# EAGLE board Grand_Wluff-Migelo (EAGLE 9.7.0)

Size 82.4 x 126.41 mm. Coordinates in mm from the lower left corner, seen from the top.
Outline: 0,0 82.4,0 82.4,126.41 0,126.41 0,0
Copper layers (1*16): Top 0.035mm / dielectric 1.5mm / Bottom 0.035mm
Design rules "default": minimum track width 6mil, minimum drill 0.35mm, track to track 6mil, track to pad 6mil, pad to pad 6mil, via to via 6mil, smd to smd 6mil, copper to edge 40mil, drill to drill 6mil, minimum pad ring 10mil, minimum via ring 8mil, stop-mask expansion 4mil, vias tented up to drill 0mil, thermal gap 10mil

## Footprints (pad centres in the part's own frame; a part is rotated, then mirrored left to right if it is on the bottom)
LEDRD254W60D565H860B = drill 0.981 pad 1.581: 1 -1.27,0; 2 1.27,0
RESAD1016W63L850D250B = drill 0.83 pad 1.43: 1 -5.08,0; 2 5.08,0
SWITCH-SPDT-PTH-8.5X3.7MM = drill 1.016 pad 1.88: 1 -2.54,0; 2 0,0; 3 2.54,0
SWITCH-MOMENTARY-PTH-6.5MM = drill 1.016 pad 1.88: 1 -3.251,2.261; 2 3.251,2.261; 3 -3.251,-2.261; 4 3.251,-2.261
ARDUINO-UNO-R3-SHIELD = drill 1.016 pad 1.88: 3.3V 24.13,-2.54; 5V 24.13,0; A0 24.13,12.7; A1 24.13,15.24; A2 24.13,17.78; A3 24.13,20.32; A4 24.13,22.86; A5 24.13,25.4; AREF -24.13,-13.97; D2 -24.13,20.32; D3 -24.13,17.78; D4 -24.13,15.24; D5 -24.13,12.7; D6 -24.13,10.16; D7 -24.13,7.62; D8 -24.13,3.81; D9 -24.13,1.27; D10 -24.13,-1.27; D11 -24.13,-3.81; D12 -24.13,-6.35; D13 -24.13,-8.89; GND@0 24.13,2.54; GND@1 24.13,5.08; GND@2 -24.13,-11.43; IOREF 24.13,-7.62; NC 24.13,-10.16; RES 24.13,-5.08; RX -24.13,25.4; SCL -24.13,-19.05; SDA -24.13,-16.51; TX -24.13,22.86; VIN 24.13,7.62

## Placement (x,y rotation side)
D1  RED  [LEDRD254W60D565H860B]  59.93,83.77 240 top
D2  RED  [LEDRD254W60D565H860B]  59.93,92.32 240 top
D3  RED  [LEDRD254W60D565H860B]  59.74,100.33 240 top
R1  150  [RESAD1016W63L850D250B]  65.92,59.05 90 top
R2  150  [RESAD1016W63L850D250B]  60.84,59.05 90 top
R3  150  [RESAD1016W63L850D250B]  63.38,59.05 90 top
R4  5k  [RESAD1016W63L850D250B]  36.42,92.27 90 top
R5  150  [RESAD1016W63L850D250B]  73.54,59.05 90 top
R6  150  [RESAD1016W63L850D250B]  71,59.05 90 top
R7  150  [RESAD1016W63L850D250B]  68.46,59.05 90 top
S1  TOGGLE  [SWITCH-SPDT-PTH-8.5X3.7MM]  73.92,104.14 270 top
S2  TOGGLE  [SWITCH-SPDT-PTH-8.5X3.7MM]  73.93,95.74 270 top
S3  TOGGLE  [SWITCH-SPDT-PTH-8.5X3.7MM]  73.92,87.35 270 top
S4  SWITCH_MOMENTARY  [SWITCH-MOMENTARY-PTH-6.5MM]  40.71,119.04 90 top
S5  TOGGLE  [SWITCH-SPDT-PTH-8.5X3.7MM]  42.61,78 270 top
U1  ARDUINO-UNO-R3-SHIELD  [ARDUINO-UNO-R3-SHIELD]  47.88,29.84 270 top

## Library data of the parts
D1-D3 = Tinkercad; CATEGORY: Opto-Electronic; SUB-CATEGORY: LED; VALUE: LED_RED
R1-R7 S1-S5 U1 = Tinkercad

## Nets
S1_P: R2.2 S1.2
S1_S: D3.1 R7.2 S1.3
S2_P: R3.2 S2.2
S2_S: D2.1 R6.2 S2.3
S3_P: R1.2 S3.2
S3_S: D1.1 R5.2 S3.3
U1_5V: S4.3 S5.1 U1.5V
U1_D2: R7.1 U1.D2
U1_D3: R1.1 U1.D3
U1_D4: R3.1 U1.D4
U1_D5: R2.1 U1.D5
U1_D12: S5.2 U1.D12
U1_D13: R4.2 S4.1 S4.2 U1.D13
U1_GND: D1.2 D2.2 D3.2 R4.1 S5.3 U1.GND@0 U1.GND@1 U1.GND@2
U1_RX: R5.1 U1.RX
U1_TX: R6.1 U1.TX

## Tracks (layer width: path | path; a pad name or v marks a point on that pad's centre or on a via)
S1_P  (1 unrouted)
S1_S  (2 unrouted)
S2_P  (1 unrouted)
S2_S  (2 unrouted)
S3_P  (1 unrouted)
S3_S  (2 unrouted)
U1_5V  (2 unrouted)
U1_D2  (1 unrouted)
U1_D3  (1 unrouted)
U1_D4  (1 unrouted)
U1_D5  (1 unrouted)
U1_D12  (1 unrouted)
U1_D13  (3 unrouted)
U1_GND  (7 unrouted)
U1_RX  (1 unrouted)
U1_TX  (1 unrouted)